# EAGLE board Leo_v1.0 (EAGLE 9.6.2)
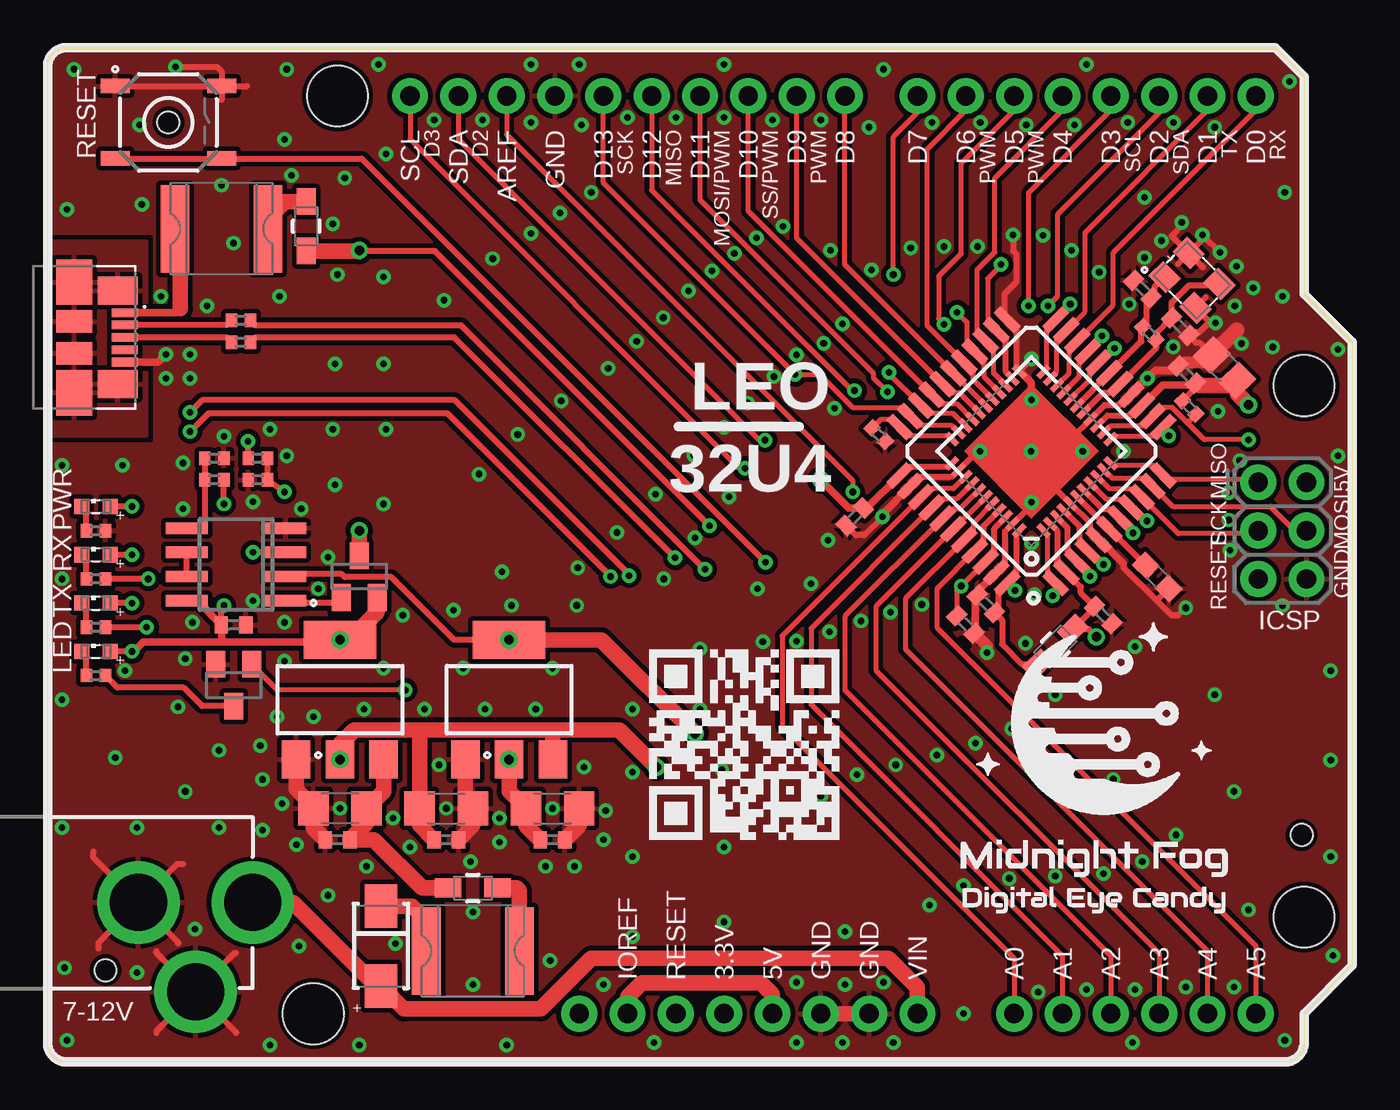
[diagram p0: board, top side]
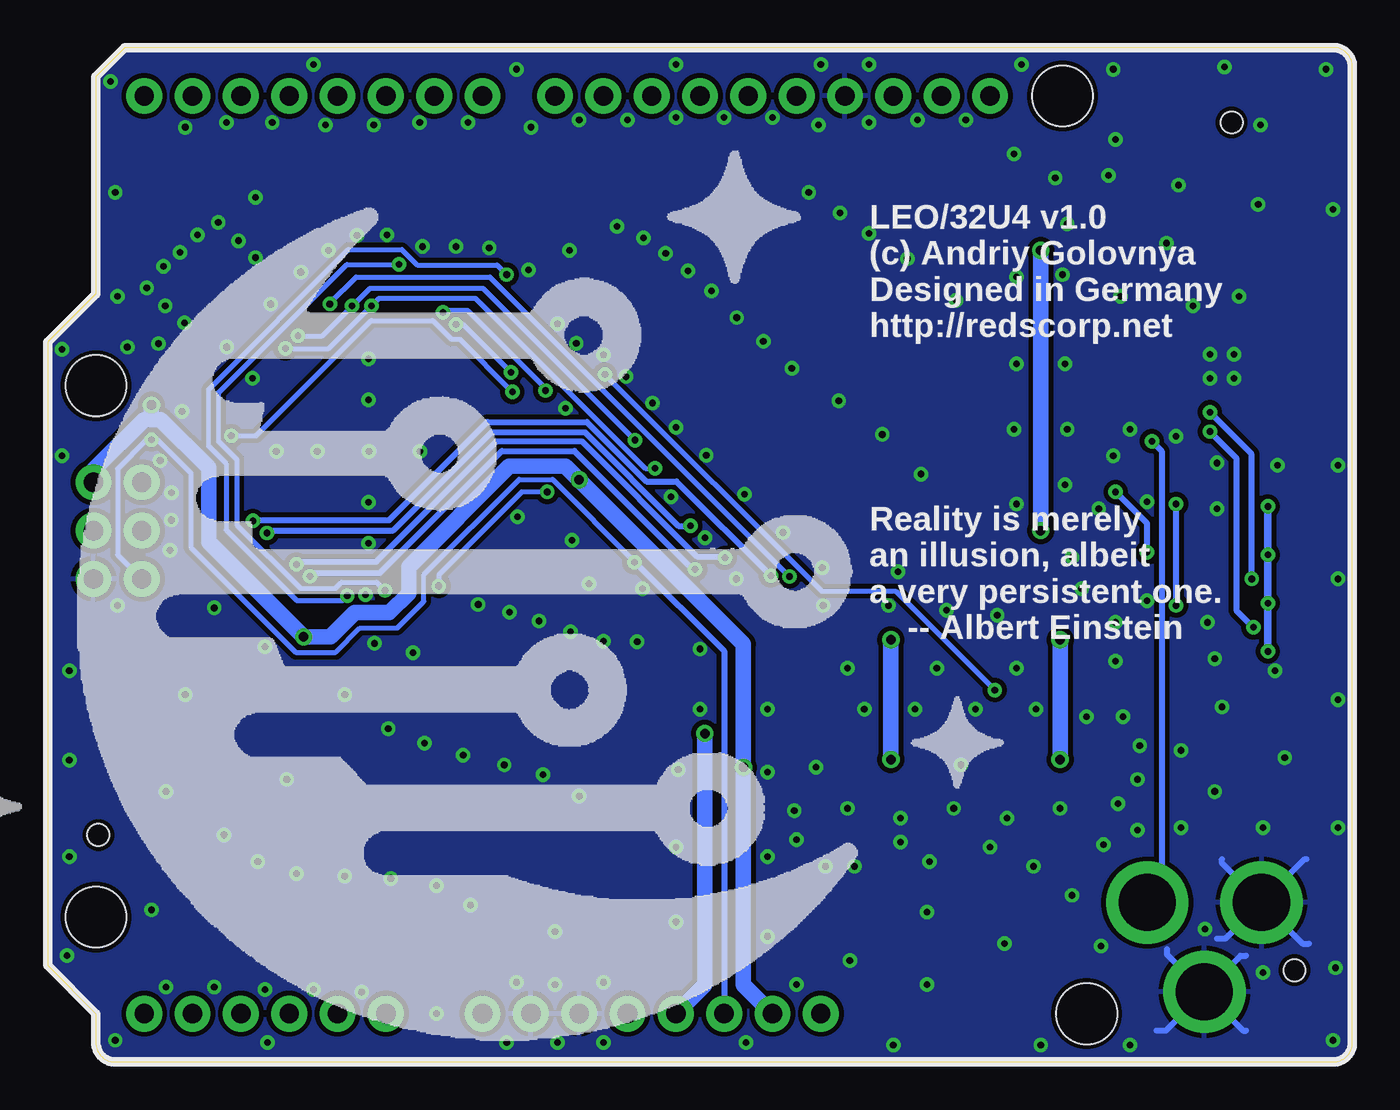
[diagram p1: board, bottom side, seen from below]

Size 68.58 x 53.34 mm. Coordinates in mm from the lower left corner, seen from the top.
Outline: 64.52,53.34 66.04,51.82 66.04,40.39 68.58,37.85 68.58,5.08 66.04,2.54 66.04,1 arc-90 65.04,0 1,0 arc-90 0,1 0,52.34 arc-90 1,53.34 64.52,53.34
Copper layers (1*16): Top 0.035mm / dielectric 1.5mm / Bottom 0.035mm
Design rules "default *": minimum track width 6mil, minimum drill 0.35mm, track to track 6mil, track to pad 6mil, pad to pad 6mil, via to via 6mil, smd to smd 6mil, copper to edge 10mil, drill to drill 6mil, minimum pad ring 10mil, minimum via ring 8mil, stop-mask expansion 4mil, vias tented up to drill 20mil, thermal gap 10mil
Net classes: 1 XUSB: width 0.305 mm; 2 USB: width 0.305 mm; 3 POWER: width 0.305 mm
Holes 3.2 mm at 13.97,2.54 15.24,50.8 66.04,7.62 66.04,35.56

## Footprints (pad centres in the part's own frame; a part is rotated, then mirrored left to right if it is on the bottom)
C1206 = smd 1.6 x 1.8: 1 -1.4,0; 2 1.4,0
C0402 = smd 0.7 x 0.9: 1 -0.65,0; 2 0.65,0
C0603 = smd 1.1 x 1: 1 -0.85,0; 2 0.85,0
C0805 = smd 1.3 x 1.5: 1 -0.95,0; 2 0.95,0
POWER_JACK_PTH = drill 2.997 pad 4.318: GND 0,7.7; GNDBREAK 4.7,10.7; PWR 0,13.7
MOLEX_47346-0001 = smd 0.45 x 1.38: 1 -1.3,2.66; 2 -0.65,2.66; 3 0,2.66; 4 0.65,2.66; 5 1.3,2.66 | smd 1.475 x 2.1: SH1 -2.462,2.3; SH2 2.462,2.3 | smd 2.375 x 1.9: SH3 -2.913,0; SH6 2.913,0 | smd 1.175 x 1.9: SH4 -0.838,0; SH5 0.838,0
1X10_NO_SILK = drill 1.016 pad 1.88: 1 0,0; 2 2.54,0; 3 5.08,0; 4 7.62,0; 5 10.16,0; 6 12.7,0; 7 15.24,0; 8 17.78,0; 9 20.32,0; 10 22.86,0
1X08_NO_SILK = drill 1.016 pad 1.88: 1 0,0; 2 2.54,0; 3 5.08,0; 4 7.62,0; 5 10.16,0; 6 12.7,0; 7 15.24,0; 8 17.78,0
2X3-NS = drill 1.016 pad 1.88: 1 -2.54,-1.27; 2 -2.54,1.27; 3 0,-1.27; 4 0,1.27; 5 2.54,-1.27; 6 2.54,1.27
1X06_NO_SILK = drill 1.016 pad 1.88: 1 0,0; 2 2.54,0; 3 5.08,0; 4 7.62,0; 5 10.16,0; 6 12.7,0
WE-TVSP_DO-214AC_UNIDIRECTIONAL = smd 2.3 x 1.7: 1 -2.1,0; 2 2.1,0
MF-SMDF050 = smd 1.5 x 4.6: 1 -2.45,0; 2 2.45,0
TOOLING-HOLE = hole 1.153: 0,0
SOT223 = smd 1.5 x 2: 1 -2.3,-3.15; 2 0,-3.15; 3 2.3,-3.15 | smd 3.8 x 2: 4 0,3.15
SO08 = smd 0.6 x 2.2: 1 -1.905,-2.6; 2 -0.635,-2.6; 3 0.635,-2.6; 4 1.905,-2.6; 5 1.905,2.6; 6 0.635,2.6; 7 -0.635,2.6; 8 -1.905,2.6
WE-CBA_0805(W=4) = smd 1.4 x 1: 1 -1.3,0; 2 1.3,0
SML0603 = smd 0.8 x 0.8: A 0.75,0; C -0.75,0
3.2X2.5_KX-7 = smd 1.3 x 1.1: 1 -1.15,-0.9; 2 1.15,-0.9; 3 1.15,0.9; 4 -1.15,0.9
R0402 = smd 0.6 x 0.7: 1 -0.5,0; 2 0.5,0
TACTILE_SWITCH_SMD_5.2MM = smd 1.524 x 0.762: 1 -2.794,1.905; 2 2.794,1.905; 3 -2.794,-1.905; 4 2.794,-1.905
SOT23 = smd 1 x 1.4: 1 -0.95,-1.1; 2 0.95,-1.1; 3 0,1.1
TQFP44 = smd 1.5 x 0.5: 1 -5.8,4; 2 -5.8,3.2; 3 -5.8,2.4; 4 -5.8,1.6; 5 -5.8,0.8; 6 -5.8,0; 7 -5.8,-0.8; 8 -5.8,-1.6; 9 -5.8,-2.4; 10 -5.8,-3.2; 11 -5.8,-4; 23 5.8,-4; 24 5.8,-3.2; 25 5.8,-2.4; 26 5.8,-1.6; 27 5.8,-0.8; 28 5.8,0; 29 5.8,0.8; 30 5.8,1.6; 31 5.8,2.4; 32 5.8,3.2; 33 5.8,4 | smd 0.5 x 1.5: 12 -4,-5.8; 13 -3.2,-5.8; 14 -2.4,-5.8; 15 -1.6,-5.8; 16 -0.8,-5.8; 17 0,-5.8; 18 0.8,-5.8; 19 1.6,-5.8; 20 2.4,-5.8; 21 3.2,-5.8; 22 4,-5.8; 34 4,5.8; 35 3.2,5.8; 36 2.4,5.8; 37 1.6,5.8; 38 0.8,5.8; 39 0,5.8; 40 -0.8,5.8; 41 -1.6,5.8; 42 -2.4,5.8; 43 -3.2,5.8; 44 -4,5.8
QFN-44 = smd 0.8 x 0.3: 1 -3.4,2.5; 2 -3.4,2; 3 -3.4,1.5; 4 -3.4,1; 5 -3.4,0.5; 6 -3.4,0; 7 -3.4,-0.5; 8 -3.4,-1; 9 -3.4,-1.5; 10 -3.4,-2; 11 -3.4,-2.5; 23 3.4,-2.5; 24 3.4,-2; 25 3.4,-1.5; 26 3.4,-1; 27 3.4,-0.5; 28 3.4,0; 29 3.4,0.5; 30 3.4,1; 31 3.4,1.5; 32 3.4,2; 33 3.4,2.5 | smd 0.3 x 0.8: 12 -2.5,-3.4; 13 -2,-3.4; 14 -1.5,-3.4; 15 -1,-3.4; 16 -0.5,-3.4; 17 0,-3.4; 18 0.5,-3.4; 19 1,-3.4; 20 1.5,-3.4; 21 2,-3.4; 22 2.5,-3.4; 34 2.5,3.4; 35 2,3.4; 36 1.5,3.4; 37 1,3.4; 38 0.5,3.4; 39 0,3.4; 40 -0.5,3.4; 41 -1,3.4; 42 -1.5,3.4; 43 -2,3.4; 44 -2.5,3.4

## Placement (x,y rotation side)
C1  47uF  [C1206]  15.37,13.34 180 top
C2  47uF  [C1206]  20.95,13.34 0 top
C3  47uF  [C1206]  26.54,13.34 0 top
C4  100nF  [C0402]  15.24,11.68 180 top
C5  100nF  [C0402]  20.95,11.68 0 top
C6  100nF  [C0402]  26.54,11.68 0 top
C7  1uF  [C0603]  58.32,25.5 315 top
C9  100nF  [C0402]  49.32,24.09 135 top
C11  100nF  [C0402]  9.78,22.99 0 top
C12  12pF  [C0402]  59.52,38.67 135 top
C13  12pF  [C0402]  57.55,40.65 315 top
C14  100nF  [C0402]  55.48,23.49 315 top
C15  100nF  [C0402]  59.88,36.16 135 top
C16  100nF  [C0402]  42.43,28.67 225 top
C17  10uF  [C0805]  61.86,36.52 135 top
C19  100nF  [C0402]  48.24,23.01 315 top
CN1  POWER_JACK  [POWER_JACK_PTH]  -2.92,8.38 270 top
CN2  47346-0001  [MOLEX_47346-0001]  1.4,38.1 270 top
CN3  DIGITAL10  [1X10_NO_SILK]  19.05,50.8 0 top
CN4  DIGITAL8  [1X08_NO_SILK]  45.72,50.8 0 top
CN5  ICSP  [2X3-NS]  64.9,27.94 270 top
CN6  POWER8  [1X08_NO_SILK]  45.72,2.54 180 top
CN7  ANALOG6  [1X06_NO_SILK]  63.5,2.54 180 top
D1  M7  [WE-TVSP_DO-214AC_UNIDIRECTIONAL]  17.53,6.1 270 top
F1  1812L050/30PR  [MF-SMDF050]  22.35,5.84 0 top
F2  1812L050/30PR  [MF-SMDF050]  9.14,43.81 0 top
HOLE1  TOOLINGHOLE  [TOOLING-HOLE]  6.35,49.4 0 top
HOLE2  TOOLINGHOLE  [TOOLING-HOLE]  3.05,4.83 0 top
HOLE3  TOOLINGHOLE  [TOOLING-HOLE]  65.91,11.94 0 top
IC1  AMS1117-5.0  [SOT223]  15.37,19.05 0 top
IC2  AMS1117-3.3  [SOT223]  24.26,19.05 0 top
IC3  LM358D  [SO08]  9.91,26.16 90 top
L1  GZ2012D601TF  [WE-CBA_0805(W=4)]  22.35,9.14 180 top
L2  GZ2012D601TF  [WE-CBA_0805(W=4)]  13.59,43.94 270 top
L3  GZ2012D601TF  [WE-CBA_0805(W=4)]  52.96,21.83 45 top
LED1  GREEN  [SML0603]  2.54,29.21 0 top
LED2  BLUE  [SML0603]  2.54,26.67 0 top
LED3  BLUE  [SML0603]  2.54,24.13 0 top
LED4  YELLOW  [SML0603]  2.54,21.59 0 top
LOGO1  MFDECLOGO_SQ_10MM  [MFDEC_SQ_10MM]  46.99,7.37 0 top
LOGO2  MFDECLOGO_L_40MM  [MFDEC_L_40MM]  78.74,-2.54 0 bottom  (outside the outline)
LOGO3  RSNURL_QR_10MM  [RSNURL_QR_10MM]  31.62,11.68 0 top
Q2  16MHz  [3.2X2.5_KX-7]  60.15,41.1 315 top
R1  22R  [R0402]  10.16,38.99 0 top
R2  22R  [R0402]  10.16,37.85 0 top
R3  10K  [R0402]  43.69,32.98 135 top
R4  100K  [R0402]  11.05,31.75 180 top
R5  100K  [R0402]  11.05,30.61 0 top
R6  1M  [R0402]  57.9,38.31 315 top
R7  1K  [R0402]  2.54,27.94 180 top
R8  1K  [R0402]  2.54,25.4 180 top
R9  1K  [R0402]  2.54,22.86 180 top
R10  1K  [R0402]  2.54,20.32 180 top
R11  100K  [R0402]  8.76,30.61 0 top
R12  10K  [R0402]  60.01,34.42 135 top
R13  100K  [R0402]  8.76,31.75 180 top
S1  RESET  [TACTILE_SWITCH_SMD_5.2MM]  6.35,49.4 0 top
T1  AO3401A  [SOT23]  16.38,25.53 0 top
T2  2N7002  [SOT23]  9.78,19.81 180 top
U2  ATMEGA32U4-AU  [TQFP44]  51.71,32.12 135 top
U3  ATMEGA32U4-MU  [QFN-44]  51.71,32.12 135 top

## Library data of the parts
C1-C7 C9 C11-C17 C19 = rcl; SPICEPREFIX: C
CN1 = SparkFun-Connectors; PROD_ID: CONN-08197
CN2 = SnapEDA-Library; MANUFACTURER: Molex
CN3 CN5 = SparkFun-Connectors
CN4 CN6 = SparkFun-Connectors; PROD_ID: CONN-08438
CN7 = SparkFun-Connectors; PROD_ID: CONN-08437
D1 = Wurth_EMC Components_WE-TVSP; DATASHEET-URL: -; IPEAK: 1.0A; MOUNT: SMT; PART-NUMBER: 824500252; PDISS: 400W; VBR: 294V; VCLAMP: 405V
F1 F2 = fuse
HOLE1-HOLE3 = _my_fiducia
IC1 IC2 = v-reg
IC3 = linear
L1-L3 = Wurth_Automotive_WE-CBA; DATASHEET-URL: https://www.we-online.com/catalog/datasheet/782853102.pdf; IR1: 1000mA; MOUNT: SMT; PART-NUMBER: 782853102; RDC-MAX: 0.3Ohm; TYPE: High Current; ZMAX: 1000Ohm
LED1-LED4 = led
LOGO1-LOGO3 = _my_logos
Q2 = crystal-geyer_V1_0
R1-R13 = rcl; SPICEPREFIX: R
S1 = SparkFun-Switches; PROD_ID: SWCH-08247; SF_SKU: COM-08720
T1 = Transistor; CATEGORY: Transistor; SUB-CATEGORY: MOSFET; TYPE: P-Channel
T2 = Transistor; CATEGORY: Transistor; SUB-CATEGORY: MOSFET; TYPE: N-Channel
U2 = SparkFun-IC-Microcontroller; PROD_ID: IC-11161
U3 = SparkFun-IC-Microcontroller; PROD_ID: IC-10828

## Nets
3.3V [POWER]: C3.1 C6.1 CN6.5 IC2.4 IC3.2
5V [POWER]: C2.1 C5.1 C11.1 C14.1 C15.1 C16.1 C17.1 CN5.2 CN6.4 CN6.7 IC1.4 IC2.3 IC3.8 L3.2 LED1.A LED2.A LED3.A LED4.A R11.2 R12.2 T1.2 U2.2 U2.14 U2.34 U3.2 U3.14 U3.34
A0: CN7.6 U2.36 U3.36
A1: CN7.5 U2.37 U3.37
A2: CN7.4 U2.38 U3.38
A3: CN7.3 U2.39 U3.39
A4: CN7.2 U2.40 U3.40
A5: CN7.1 U2.41 U3.41
AREF: C19.1 CN3.3 U2.42 U3.42
AVCC: C9.1 L3.1 U2.24 U2.44 U3.24 U3.44
D0_RX: CN4.8 U2.20 U3.20
D1_TX: CN4.7 U2.21 U3.21
D2_SDA: CN3.2 CN4.6 U2.19 U3.19
D3_SCL: CN3.1 CN4.5 U2.18 U3.18
D4: CN4.4 U2.25 U3.25
D5_PWM: CN4.3 U2.31 U3.31
D6_PWM: CN4.2 U2.27 U3.27
D7: CN4.1 U2.1 U3.1
D8: CN3.10 U2.28 U3.28
D9_PWM: CN3.9 U2.29 U3.29
D10_SS: CN3.8 U2.30 U3.30
D11_MOSI: CN3.7 U2.12 U3.12
D12_MISO: CN3.6 U2.26 U3.26
D13_SCK: CN3.5 T2.1 U2.32 U3.32
GND [POWER]: C1.2 C2.2 C3.2 C4.2 C5.2 C6.2 C7.2 C9.2 C11.2 C12.1 C13.1 C14.2 C15.2 C16.2 C17.2 C19.2 CN1.GND CN1.GNDBREAK CN2.5 CN3.4 CN5.6 CN6.2 CN6.3 IC1.1 IC2.1 IC3.4 R3.1 R5.1 R7.1 R13.1 S1.1 T2.2 U2.5 U2.15 U2.23 U2.35 U2.43 U3.5 U3.15 U3.23 U3.35 U3.43
HWB: R3.2 U2.33 U3.33
MCU_OSC_IN: C12.2 Q2.3 R6.2 U2.16 U3.16
MCU_OSC_OUT: C13.2 Q2.1 R6.1 U2.17 U3.17
N$1: IC3.5 R11.1 R13.2
N$2: D1.1 F1.1
N$3: F1.2 L1.1
N$4: F2.2 L2.1
N$6: IC3.6 IC3.7
N$7: LED1.C R7.2
N$8: IC3.1 T1.1
N$9: LED3.C R9.2
N$10: LED2.C R8.2
N$11: LED4.C R10.2
N$12: IC3.3 R4.1 R5.2
N$13: R10.1 T2.3
N$14: C1.1 C4.1 IC1.3 L1.2
RESET: CN5.5 CN6.6 R12.1 S1.3 U2.13 U3.13
RX_LED: R8.1 U2.8 U3.8
SPI_MISO: CN5.1 U2.11 U3.11
SPI_MOSI: CN5.4 U2.10 U3.10
SPI_SCK: CN5.3 U2.9 U3.9
TX_LED: R9.1 U2.22 U3.22
UCAP: C7.1 U2.6 U3.6
USB_D_M [USB]: R1.2 U2.3 U3.3
USB_D_P [USB]: R2.2 U2.4 U3.4
USB_SHIELD: CN2.SH1 CN2.SH2 CN2.SH3 CN2.SH4 CN2.SH5 CN2.SH6
VIN [POWER]: CN1.PWR CN6.1 D1.2 R4.2
VUSB [POWER]: L2.2 T1.3 U2.7 U3.7
XUSB [POWER]: CN2.1 F2.1
XUSB_D_M [XUSB]: CN2.2 R1.1
XUSB_D_P [XUSB]: CN2.3 R2.1

## Tracks (layer width: path | path; a pad name or v marks a point on that pad's centre or on a via)
3.3V  (via drill 0.5)
  Top 0.305: IC2.4 21.36,22.2 18.07,25.5 15.63,25.5 15.47,25.65 13.51,25.65 13.38,25.53 IC3.2
  Top 0.813: v34.04,17.27 29.11,22.2 IC2.4 | v24.26,15.91 24.26,14.22 C3.1 25.14,12.43 C6.1
  Bottom 0.813: CN6.5 34.04,4.06 v34.04,17.27 | IC2.4 v24.26,15.91
  other vias: 24.26,22.2
5V  (via drill 0.35, 0.5)
  Top 0.305: v4.45,21.59 LED4.A | v4.45,24.13 LED3.A | v4.45,26.67 LED2.A | v4.45,29.21 LED1.A | U3.14 55.72,34 57.01,34 57.51,34.5 U2.14 | U3.2 53.05,27.94 53.05,26.24 U2.2 54.31,24.99 54.31,24.66 C14.1 55.02,23.88 L3.2 54.72,22.75 v55.11,22.35 v55.12,22.35 | U3.34 47.35,31.29 45.23,31.29 U2.34 | C11.1 9.13,23.86 v9.27,24 | v9.27,29.34 v9.26,29.34 R11.2 | 43.06,29.13 C16.1 | R12.2 60.44,35.56 60.56,35.56
  Top 0.406: v4.45,21.59 4.52,21.59 5.03,22.1 9.14,22.1 | IC1.4 15.27,22.1 9.14,22.1 | IC3.8 7.86,24.26 C11.1 9.14,22.97 9.14,22.1 | 57.51,34.5 58.6,35.59 60.24,35.59 C15.1 60.42,35.7 | U2.34 43.06,29.13 | v40.64,30.61 42.12,29.13 C16.1
  Top 0.813: CN6.4 38.1,3.56 37.49,4.17 31.22,4.17 30.48,3.43 CN6.7 | T1.2 17.33,23.66 15.87,22.2 IC1.4 | C5.1 19.55,12.43 C2.1 19.55,17.46 19.56,17.46 | v32,15.49 30.04,17.46 26.54,17.46 | 26.54,17.46 19.56,17.46 | 19.56,17.46 16.13,17.46 15.37,16.7 v15.37,15.91 | IC2.3 26.56,17.45 26.54,17.46 | v63.12,34.54 62.53,35.13 C17.1 62.24,35.56 60.56,35.56 60.42,35.7
  Bottom 0.305: v9.27,24 v9.27,29.34
  Bottom 0.406: v4.45,21.59 v4.45,24.13 v4.45,26.67 v4.45,29.21
  Bottom 0.813: CN6.7 32,4.06 v32,15.49 32,21.97 v40.64,30.61 41.37,31.34 44.3,31.34 49.61,26.04 49.61,24.63 50.62,23.62 52.45,23.62 53.72,22.35 v55.12,22.35 60.11,27.35 60.11,31.25 62.65,33.78 63.12,33.78 | IC1.4 v15.37,15.91 | CN5.2 66.17,31.11 63.5,33.78 63.12,33.78 | 63.12,33.78 v63.12,34.54
  other vias: 15.37,22.2
A0
  Top 0.254: U3.36 47.61,30.14 46.34,30.14 U2.36 38.61,22.41 38.61,17.65 50.8,5.46 CN7.6
A1
  Top 0.254: U3.37 47.78,29.6 46.93,29.6 U2.37 40.13,22.8 40.13,18.8 53.34,5.59 CN7.5
A2
  Top 0.254: U3.38 47.95,29.06 47.52,29.06 U2.38 41.91,23.45 41.91,19.56 55.88,5.59 CN7.4
A3
  Top 0.254: U3.39 U2.39 43.54,23.94 43.54,20.6 58.42,5.71 CN7.3
A4
  Top 0.254: U3.40 48.67,28.37 48.67,27.95 U2.40 45.09,24.36 45.09,21.72 60.96,5.84 CN7.2
A5
  Top 0.254: U2.41 46.74,24.88 46.74,22.86 63.5,6.1 CN7.1
  Top 0.305: U2.41 49.19,27.34 49.19,28.19 U3.41
AREF  (via drill 0.35)
  Top 0.254: CN3.3 24.13,48.77 42.32,30.58 v42.32,29.97 | U2.42 v48.02,25.02 47.78,24.79 C19.1
  Top 0.305: U3.42 49.76,28.04 49.76,26.77 U2.42
  Bottom 0.254: v42.32,29.97 43.66,29.97 48.02,25.62 v48.02,25.02
AVCC  (via drill 0.35)
  Top 0.254: v50.11,41.94 50.11,41.9 49.41,41.2 49.41,38.94 U2.24 | U2.44 50.83,24.79 v50.85,24.79
  Top 0.305: U3.44 50.9,27.77 50.9,25.65 U2.44 49.96,24.71 49.96,23.8 C9.1 50.16,23.24 50.16,21.97 51.23,20.9 L3.1 | U3.24 50.36,36.29 50.36,37.99 U2.24
  Bottom 0.254: v50.85,24.79 51.28,25.22 53.14,25.22 53.47,24.89 55.29,24.89 58.63,28.24 58.63,31.67 59.59,32.62 59.59,35.2 52.85,41.94 v50.11,41.94
D0_RX
  Top 0.254: U3.20 53.68,36.21 53.68,37.48 U2.20 56.01,39.81 56.01,42.55 63.5,50.04 CN4.8
D1_TX
  Top 0.254: U3.21 53.04,36.27 53.04,37.97 U2.21 54.53,39.47 54.53,43.61 60.96,50.04 CN4.7
D2_SDA  (via drill 0.35)
  Top 0.254: U3.19 54.22,36.04 54.22,36.89 U2.19 55.42,38.09 v55.42,38.18 | v52.58,39.75 53.09,40.26 53.09,44.58 58.42,49.91 CN4.6 | CN3.2 21.59,48.51 37.41,32.7 v37.71,32.7
  Bottom 0.254: v55.42,38.18 54.15,38.18 v52.58,39.75 52.57,39.75 51.63,40.69 45.7,40.69 v37.71,32.7
D3_SCL  (via drill 0.35)
  Top 0.254: U3.18 54.76,35.88 54.76,36.3 U2.18 55.98,37.52 v56.08,37.52 | v51.56,39.75 51.56,45.72 55.88,50.04 CN4.5 | CN3.1 19.05,48.51 36.35,31.22 v36.65,31.22
  Bottom 0.254: v56.08,37.52 53.79,37.52 v51.56,39.75 51.16,40.16 46.1,40.16 37.16,31.22 v36.65,31.22
D4
  Top 0.254: U3.25 49.73,36.21 49.73,37.48 U2.25 48.84,38.37 48.84,41.63 49.78,42.57 49.78,46.48 53.34,50.04 CN4.4
D5_PWM  (via drill 0.35)
  Top 0.254: U3.31 47.61,34.09 46.34,34.09 U2.31 44.22,36.21 v44.22,36.27 | v47.12,38.79 46.84,39.06 46.84,41.31 48.03,42.5 48.03,47.27 50.8,50.04 CN4.3
  Bottom 0.254: v47.12,38.79 46.76,38.79 44.25,36.27 v44.22,36.27
D6_PWM
  Top 0.254: U3.27 48.66,35.88 48.66,36.3 U2.27 46.23,38.73 46.23,48.01 48.26,50.04 CN4.2
D7  (via drill 0.35)
  Top 0.254: U3.1 52.56,27.73 52.56,25.61 U2.1 53.09,25.08 53.09,24.77 v52.83,24.51 | CN4.1 45.72,49.91 44.45,48.64 v44.45,41.4
  Bottom 0.254: v52.83,24.51 53.09,24.26 55.48,24.26 59.2,27.98 59.2,31.45 60.12,32.38 60.12,35.37 52.77,42.72 49.96,42.72 49.15,41.91 44.96,41.91 v44.45,41.4
D8
  Top 0.254: U3.28 U2.28 41.91,41.91 CN3.10
D9_PWM
  Top 0.254: U3.29 47.95,35.17 47.52,35.17 U2.29 39.37,43.32 CN3.9
D10_SS
  Top 0.254: U3.30 47.83,34.58 46.98,34.58 U2.30 36.83,44.73 CN3.8
D11_MOSI  (via drill 0.35)
  Top 0.254: U3.12 56.05,32.92 58.17,32.92 U2.12 58.55,33.3 v58.93,32.92 | CN3.7 34.29,45.34 43.41,36.22 43.41,35.97 v44.15,35.23
  Bottom 0.254: v44.15,35.23 46.92,38 47.35,38 48.34,38.99 51.56,38.99 57.63,32.92 v58.93,32.92
D12_MISO  (via drill 0.35)
  Top 0.254: U3.26 49.24,36 49.24,36.85 U2.26 48.31,37.78 48.31,38.91 v47.8,39.42 | CN3.6 31.75,45.85 42.29,35.31 v42.42,35.31
  Bottom 0.254: v42.42,35.31 42.42,35.43 46.51,39.52 47.7,39.52 v47.8,39.42
D13_SCK  (via drill 0.35)
  Top 0.254: U3.32 47.53,33.46 45.84,33.46 U2.32 44.88,34.42 42.32,34.42 40.58,36.15 v39.29,36.15 29.21,46.23 CN3.5 | v18.8,19.56 12.08,19.56 T2.1
  Bottom 0.254: v39.29,36.15 27.9,24.77 24,24.77 v18.8,19.56
GND  (via drill 0.35)
  Top 0.305: S1.1 10.49,51.31 | v6.73,52.32 8.89,52.32 9.14,52.07 9.14,50.6 | v59.61,44.15 59.7,44.06 59.07,43.43 60.73,41.78 | v61.62,42.57 60.81,43.38 59.41,41.98 | 60.87,40.2 60.33,39.66 61.13,38.86 v61.39,38.86 61.01,38.86 60.52,38.37 60.13,38.37 C12.1 60.37,37.82 60.55,37.82 C17.2 | CN1.GND 2.41,10.75 2.41,11.05 | CN1.GND 6.81,10.41 7.11,10.41 | CN1.GND 6.86,6.3 6.86,6.22 | CN1.GND 2.67,6.27 2.67,5.97 | CN1.GNDBREAK 5.71,5.75 5.71,5.84 | CN1.GNDBREAK 9.81,5.71 9.91,5.71 | CN1.GNDBREAK 5.71,1.62 5.71,1.52 | CN1.GNDBREAK 9.91,1.55 9.91,1.52 | U2.15 56.4,34.55 55.55,34.55 U3.15 53.78,32.77 53.78,32.75 | U2.5 54.76,27.93 54.76,28.36 U3.5 52.53,30.58 52.52,30.58 | U2.43 50.32,26.2 50.32,27.89 U3.43 51.61,29.19 51.61,29.32 | U2.35 45.84,30.77 47.53,30.77 U3.35 48.96,32.2 49.1,32.2 | U3.23 50.9,36.46 50.9,38.58 U2.23 50.29,39.19 50.29,40.39 50.92,41.02 50.92,42.47 50.75,42.65 v50.75,43.48 | 59.16,36.35 C15.2 | U3.23 51.15,36.29 | 48.86,24.74 C9.2 48.75,24.44 | C19.2 48.75,22.6 | 58.29,24.27 56.55,26.01 56.55,26.22 | C7.2 58.29,24.27 | 43.88,28.82 v43.88,28.67 42.92,27.7 42.48,27.7 C16.2 | v49.01,32.12 v49,32.13 | 49.38,21.87 v49.38,21.52 | 58.29,24.27 59.06,23.5 59.44,23.5 v59.82,23.88 | U3.23 51.07,36.33 v51.71,36.97
  Top 0.406: CN2.5 5.81,36.8 v6.22,37.21 | U2.15 58.21,36.35 59.16,36.35 | 51.15,36.29 51.7,35.73 v51.7,34.82 | U2.43 48.86,24.74 | 48.75,24.44 48.75,22.6 | C15.2 59.59,36.78 | 60.78,36.78 C17.2 | 56.55,26.22 55.32,27.45 U2.5 | U2.35 43.88,28.82
  Top 0.61: 59.59,36.78 60.78,36.78 | C19.2 49.38,21.87
  Top 0.813: CN6.2 CN6.3 | IC1.1 13.07,14.36 14,13.37 | C3.2 27.94,12.43 C6.2 | C1.2 13.97,12.31 C4.2 | IC2.1 21.96,13.73 C2.2 22.36,12.43 C5.2 | C17.2 62.49,38.49
  Bottom 0.305: CN1.GND 2.49,10.67 2.41,10.67 | CN1.GND 6.86,10.46 6.86,10.67 | CN1.GND 2.62,6.22 2.29,6.22 | CN1.GND 6.68,6.48 7.11,6.48 | CN1.GNDBREAK 5.87,5.59 5.59,5.59 | CN1.GNDBREAK 9.74,5.65 9.74,5.93 | CN1.GNDBREAK 5.75,1.65 5.59,1.65 | CN1.GNDBREAK 9.81,1.65 10.29,1.65
  other vias: 62.39,39.75 63.37,40.7 56.85,39.85 21.34,23.75 18.67,23.5 25.65,18.54 35.43,15.37 32.38,25.4 8.38,39.75 9.78,43.05 9.14,46.1 14.73,26.54 15.11,30.35 12.45,23.11 7.11,31.5 13.34,29.08 10.79,24.26 7.24,21.21 7.24,14.22 12.45,21.08 9.02,16.38 11.18,16.64 4.06,20.57 3.94,31.37 6.22,35.94 12.45,48.51 4.83,49.28 1.4,52.2 22.35,4.06 22.35,7.87 19.05,11.3 18.16,12.83 17.65,20.7 12.32,13.59 18.29,6.22 26.42,5.33 31.88,1.02 29.21,4.06 23.75,12.83 23.75,11.56 26.16,10.29 35.56,7.37 39.37,4.19 43.94,4.19 41.78,1.02 48.13,2.54 67.44,15.88 67.56,5.59 65.02,1.14 15.11,36.7 14.99,44.07 15.62,46.48 65.28,51.56 67.82,37.47 64.9,40.26 67.82,31.88 67.44,20.57 0.76,12.32 11.3,12.19 9.02,12.32 1.02,1.14 11.68,0.89 16.38,0.89 24.13,0.89 0.89,4.95 4.7,12.32 0.76,31.37 0.76,25.4 3.56,16 0.76,19.05 25.4,52.45 27.94,52.45 17.4,52.45 43.94,52.2 35.56,52.45 54.61,52.45 65.02,45.72 4.95,45.09 1.02,44.83 7.49,37.21 7.49,35.94 5.97,40.26 14.73,8.76 13.97,18.16 12.06,18.16 13.08,11.43 30.73,6.6 12.57,52.2 13.21,6.1 7.75,6.99 4.7,4.7 59.16,37.59 41.91,4.06 44.45,1.02 39.37,1.02 35.56,11.3 21.84,20.7 6.86,18.67 12.19,40.26 20.57,15.62 20.95,13.34 14.22,24.89 26.54,13.34 15.37,13.34 16.76,10.29 57.02,1.02 12.83,46.61 22.99,18.54 26.54,20.7 16.64,18.54 29.21,11.68 22.23,10.54 11.3,14.86 29.34,13.21 27.69,10.29 15.24,41.4 17.65,29.34 23.88,25.78 11.68,33.27 30.73,18.54 30.73,10.79 67.44,10.79 28.19,15.49 30.73,15.24 19.81,18.54 54.4,32.12 51.71,29.42 56.56,32.12 51.71,27.27 51.68,32.12 51.4,22.01 64.39,37.59 61.51,34.22 62.07,29.93 17.78,47.75 14.99,33.27 12.57,31.88 7.11,29.08 41.91,6.86 34.29,21.72 34.29,18.54 64.9,24 62.75,37.77 57.65,42.29 7.62,23.11 58.54,43.18 60.7,43.49 62.48,41.84 62.08,28.5 62.15,26.9 62.66,31.62 34.04,27.56 38.66,43.94 41.15,42.67 43.31,41.66 35.81,29.72 41.02,27.43 55.27,41.53 53.82,42.67 52.32,43.46 48.87,42.88 47.12,42.88 45.36,42.8 41.78,38.81 40.79,37.8 39.37,37.19 38.18,36.04 36.78,34.65 35.56,33.38 33.96,31.9 31.95,29.84 29.92,27.84 27.86,25.98 41.35,34.37 45.95,24.05 44.3,23.65 42.75,23.19 41.1,22.63 39.37,22.12 37.31,24.89 24.38,24 27.81,24 61.34,49.15 59.18,49.4 56.77,49.4 53.98,49.28 51.44,49.28 49.02,49.4 46.48,49.4 43.18,49.15 40.64,49.53 38.1,49.53 35.56,49.66 33.02,49.66 30.48,49.66 25.4,49.4 28.07,49.28 22.86,49.53 20.32,49.53 17.65,41.27 17.65,36.7 37.26,43.33 36.09,42.52 34.92,41.61 33.68,40.54 32.36,39.14 30.96,37.9 29.46,36.47 27,34.77 24.71,32.99 22.68,30.91 28.57,45.72 26.92,44.65 25.4,43.56 23.39,42.24 20.83,40.06 52.07,3.68 54.61,3.81 57.15,3.81 59.82,3.94 62.36,3.94 40.13,25.15 56.01,14.86 63.12,8 57.15,21.84 52.96,19.3 17.78,33.27 61.34,19.3 62.36,14.22 37.59,22.1 40.64,13.97 50.67,17.53 48.77,16.76 46.74,16.13 44.58,15.62 42.55,15.11 48.13,9.27 50.55,9.65 52.96,9.78 55.5,9.91 57.53,10.54 59.31,11.94 46.35,8.26 10.79,29.46 9.27,32.89 51.87,24.56 57.81,35.94 57.66,45.47
  pour Top (isolate 0.254, rank 2): 0,0 0,55.88 72.52,55.88 72.52,0
  pour Bottom (isolate 0.254, rank 2): 0,0 0,58.93 75.82,58.93 75.82,0
  pour Top (isolate 0.254, rank 2, no thermals): 51.18,34.54 51.18,36.07 50.8,36.45 50.8,38.35 49.78,39.37 49.78,40.89 50.29,41.4 51.18,41.4 51.18,39.24 52.07,38.35 52.07,36.58 51.94,36.45 51.94,34.54
  pour Top (isolate 0.254, no thermals): 57.21,35.88 58.67,37.34 58.67,38.35 59.56,39.24 60.33,38.48 60.45,38.48 61.21,39.24 61.72,39.24 62.99,37.97 62.99,37.59 61.47,36.07 58.42,36.07 57.72,35.37
HWB
  Top 0.254: U3.33 47.36,32.92 45.24,32.92 U2.33 44.38,33.78 43.78,33.78 R3.2
MCU_OSC_IN
  Top 0.305: Q2.3 61.51,40.83 59.98,40.83 59.08,39.93 59.08,39.15 C12.2 58.26,38.33 R6.2 58.26,37.53 U2.16 55.91,35.19 55.48,35.19 U3.16
MCU_OSC_OUT
  Top 0.305: Q2.1 58.19,40.76 58.19,40.37 C13.2 57.75,39.94 57.75,38.87 R6.1 57.49,38.61 57.49,37.9 U2.17 U3.17
N$1
  Top 0.305: R13.2 R11.1 8.26,28.2 8.13,28.07 IC3.5
N$2
  Top 0.813: D1.1 19.18,8.2 19.9,7.47 F1.1
N$3
  Top 0.813: L1.1 24.67,9.14 24.8,9.01 F1.2
N$4
  Top 0.813: L2.1 12.48,45.24 11.59,44.36 F2.2
N$6
  Top 0.305: IC3.7 IC3.6
N$7
  Top 0.305: R7.2 2.04,28.96 LED1.C
N$8
  Top 0.305: T1.1 15.14,24.13 12.63,24.13 IC3.1
N$9
  Top 0.305: R9.2 2.04,23.88 LED3.C
N$10
  Top 0.305: R8.2 2.04,26.42 LED2.C
N$11
  Top 0.305: R10.2 2.04,21.34 LED4.C
N$12  (via drill 0.35)
  Top 0.305: R4.1 R5.2 v12.45,29.97 | IC3.3 v10.79,26.8
  Bottom 0.305: v10.79,26.8 10.79,28.32 v12.45,29.97
N$13
  Top 0.305: T2.3 8.13,18.71 7.16,19.68 3.67,19.68 R10.1
N$14
  Top 0.813: IC1.3 17.67,14.23 C1.1 16.77,12.56 C4.1 17.14,11.68 19.68,9.14 L1.2
RESET  (via drill 0.35)
  Top 0.254: U3.13 55.88,33.46 57.58,33.46 U2.13 58.53,34.42 59.1,34.42 59.97,33.55 | v63.11,32.72 60.8,32.72 59.97,33.55 | R12.1 59.97,33.67 59.97,33.55
  Top 0.305: v37.73,26.27 16.51,47.5 S1.3
  Bottom 0.254: CN5.5 64.9,26.67 64.9,31.19 63.36,32.72 v63.11,32.72 62.82,32.72 61.05,30.95 61.05,27.06 55.53,21.54 53.44,21.54 52.16,22.81 50.2,22.81 48.8,24.22 48.8,25.63 43.8,30.63 42.03,30.63 37.71,26.3
  Bottom 0.305: CN6.6 33.02,21.61 37.71,26.3 v37.73,26.27
RX_LED  (via drill 0.35)
  Top 0.254: U3.8 55.64,29.6 56.48,29.6 U2.8
  Top 0.305: v5.29,25.4 R8.1 | U2.8 57.09,29.15 v57.78,28.45 | v7.49,34.16 8.13,34.8 21.41,34.8 30.6,25.61 v30.56,25.57
  Bottom 0.305: v57.78,28.45 57.76,28.45 57.71,28.5 50.62,28.5 45.47,33.65 40.23,33.65 37.11,30.53 35.53,30.53 30.57,25.57 v30.56,25.57 | v5.29,25.4 5.29,31.96 v7.49,34.16
SPI_MISO
  Top 0.254: 58.71,30.77 58.85,30.63 63.48,30.63 CN5.1 | U2.11 58.11,31.37 55.99,31.37 U3.11
  Top 0.305: U2.11 58.71,30.77
SPI_MOSI
  Top 0.254: U3.10 55.95,30.7 57.65,30.7 U2.10 59.14,29.21 64.26,29.21 65.53,27.94 CN5.4
SPI_SCK
  Top 0.254: U3.9 55.8,30.14 57.08,30.14 U2.9 59.43,27.79 63.48,27.79 CN5.3
TX_LED  (via drill 0.35)
  Top 0.254: U3.22 52.52,36.46 52.52,38.58 U2.22 53.75,39.81 v53.75,39.85
  Top 0.305: v7.49,33.15 8.46,34.12 21,34.12 v29.59,25.53 | v5.21,22.86 R9.1
  Bottom 0.254: v53.75,39.85 53.75,39.89 52.37,41.27 45.34,41.27 v29.59,25.53
  Bottom 0.305: v7.49,33.15 6.1,31.75 6.1,23.75 v5.21,22.86
UCAP
  Top 0.305: U3.6 U2.6 C7.1
USB_D_M  (via drill 0.35)
  Top 0.305: R1.2 10.91,38.73 21.72,38.73 v34.54,25.91 | U3.3 53.6,28.1 53.6,26.82 U2.3 54.78,25.64 v54.78,25.55
  Bottom 0.305: v54.78,25.55 54.82,25.55 54.66,25.7 51.13,25.7 44.71,32.13 40.89,32.13 34.67,25.91 v34.54,25.91
USB_D_P  (via drill 0.35)
  Top 0.305: R2.2 10.91,38.1 21.39,38.1 v32.98,26.5 | U3.4 54.22,28.19 54.22,27.34 U2.4 55.4,26.16 v55.5,26.16
  Bottom 0.305: v55.5,26.16 55.5,26.18 55.37,26.31 51.3,26.31 44.97,32.64 40.51,32.64 34.47,26.59 33.07,26.59 v32.98,26.5
USB_SHIELD
  pour Top (isolate 0.254): 5.21,39.88 3.05,39.88 3.05,36.32 5.21,36.32 5.21,32.89 0,32.89 0,43.18 5.21,43.18
VIN  (via drill 0.35)
  Top 0.305: R4.2 v10.55,32.63 v10.54,32.64
  Top 0.813: CN1.PWR 12.89,8.38 17.27,4 D1.2 18.73,2.79 25.91,2.79 28.57,5.46 44.2,5.46 45.72,3.94 CN6.1
  Bottom 0.305: v10.54,32.64 10.03,32.13 10.03,9.13 CN1.PWR
VUSB  (via drill 0.35, 0.5)
  Top 0.305: U3.7 55.47,29.06 55.89,29.06 U2.7 57.05,27.91 v57.05,27.81 | v34.8,28.19 20.35,42.64 16.38,42.64
  Top 0.813: L2.2 16.38,42.64 v16.38,42.67 | v16.38,27.94 T1.3
  Bottom 0.305: v57.05,27.81 56.91,27.95 50.41,27.95 45.24,33.12 40.35,33.12 35.42,28.19 v34.8,28.19
  Bottom 0.813: v16.38,42.67 v16.38,27.94
XUSB
  Top 0.406: CN2.1 6.76,39.4 6.99,39.62
  Top 0.813: 6.99,39.62 6.99,43.52 F2.1
XUSB_D_M
  Top 0.305: CN2.2 9.42,38.75 R1.1
XUSB_D_P
  Top 0.305: CN2.3 9.41,38.1 R2.1

## Text on the board
tPlace: SCL | D3 | SDA | D2 | AREF | GND | D13 | SCK | D12 | MISO | D11 | MOSI/PWM | D10 | SS/PWM | D9 | PWM | D8 | D7 | D6 | PWM | D5 | PWM | D4 | D3 | SCL | D2 | SDA | D1 | TX | D0 | RX | RESET | LEO | 32U4 | MISO | 5V | PWR | + | SCK | MOSI | RX | + | RESET | GND | TX | + | ICSP | + | LED | IOREF | RESET | 3.3V | 5V | GND | GND | VIN | A0 | A1 | A2 | A3 | A4 | A5 | + | 7-12V
bPlace: LEO/32U4 v1.0 / (c) Andriy Golovnya / Designed in Germany / http://redscorp.net | Reality is merely / an illusion, albeit / a very persistent one. / -- Albert Einstein